# Altium PCB Power Controller V2.0.PcbDoc
Units mil, origin at the board's own origin, x right, y up, seen from the top; angles counter-clockwise.
Board outline 3317.12 x 5443.1 mil, 2 copper layers (Top Layer, Bottom Layer); 20 components, 20 nets, 69 pads, 0 vias.
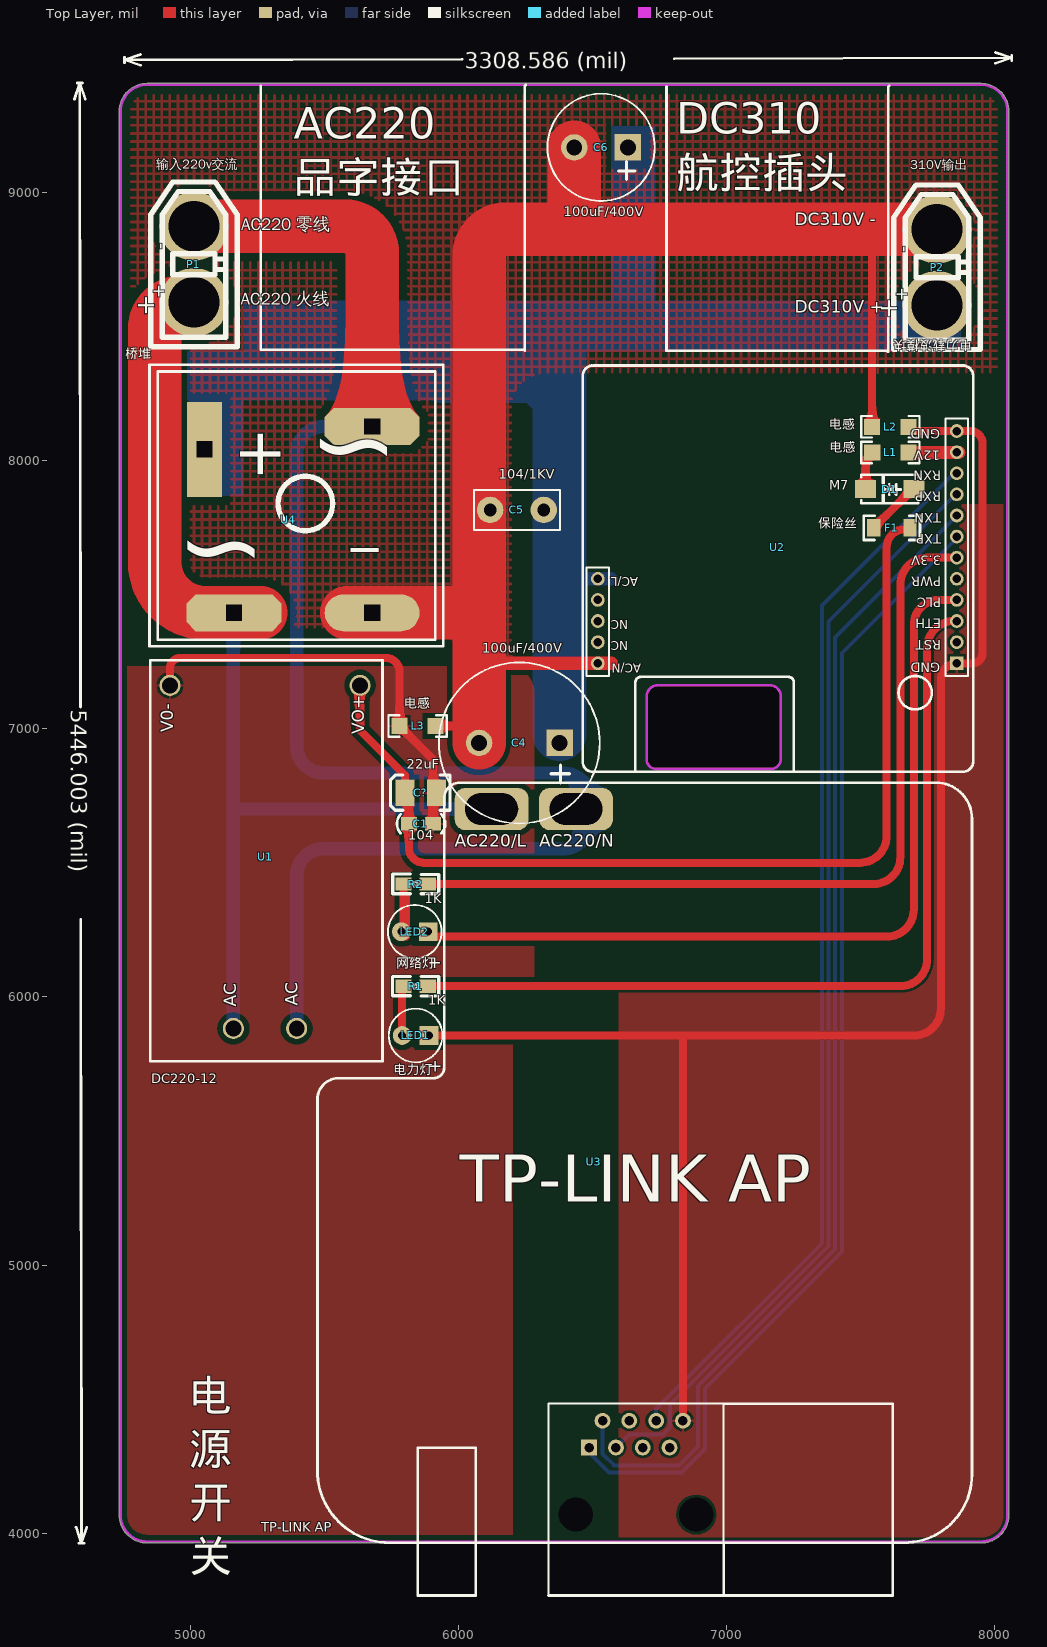
[diagram p0: Top Layer view]
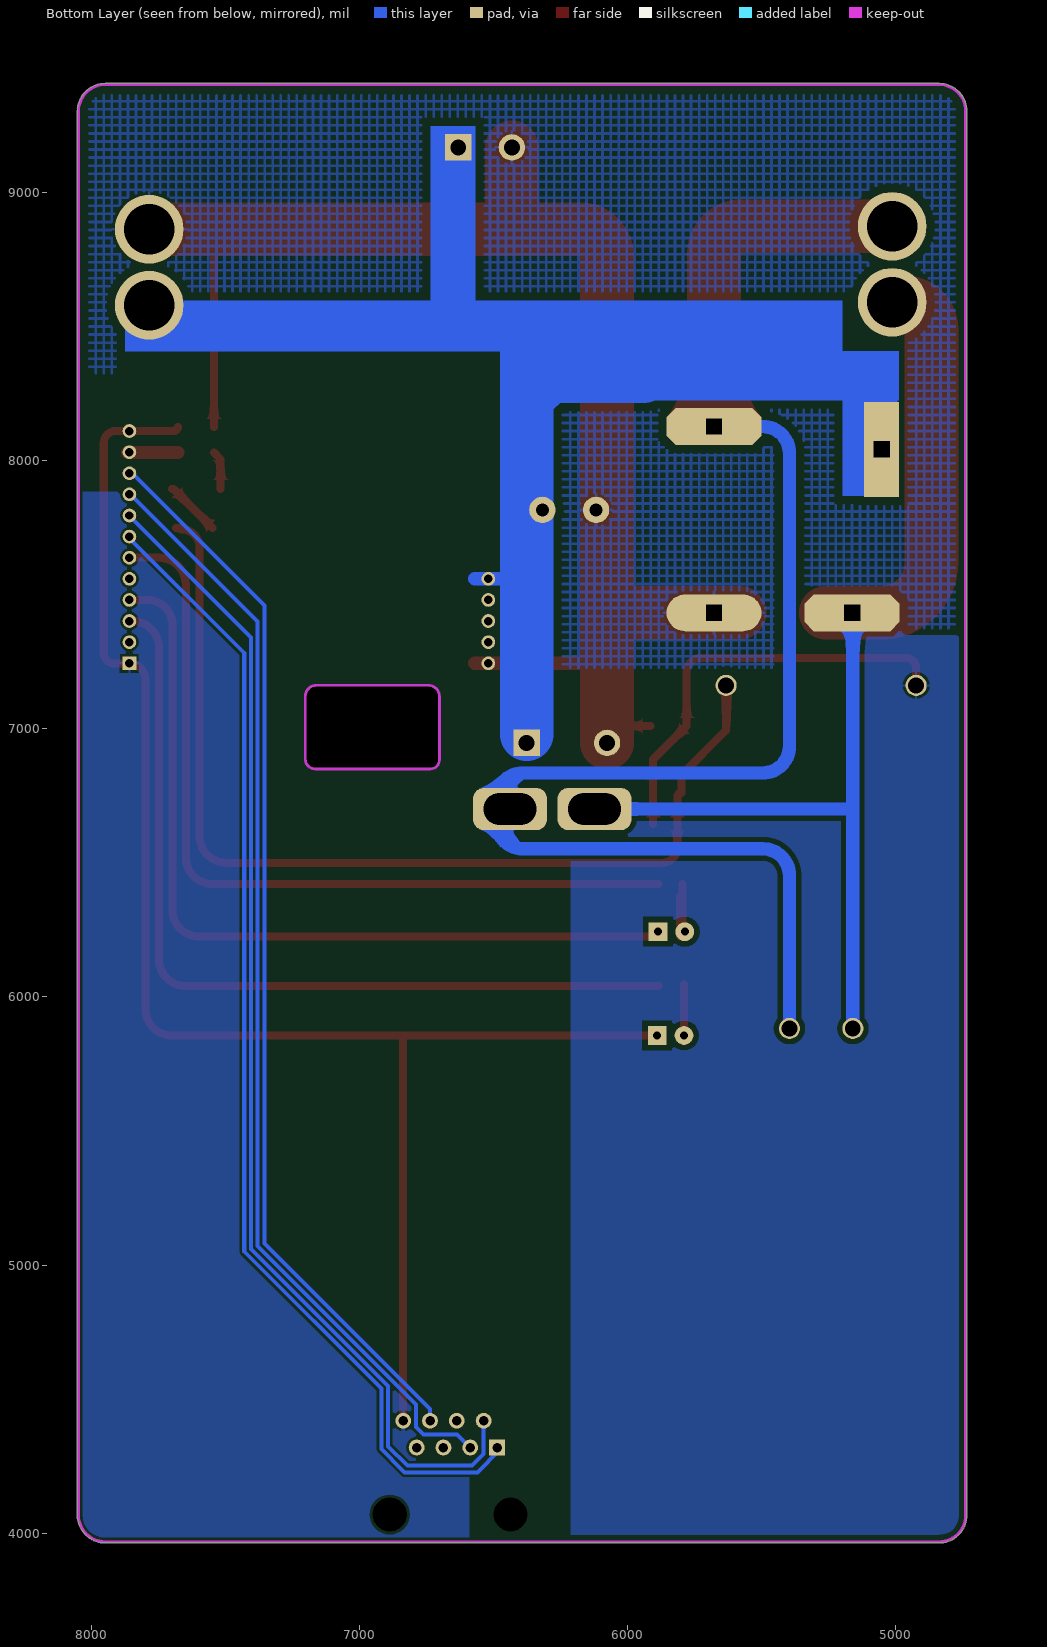
[diagram p1: Bottom Layer view, seen from below]

## Layer stack, top to bottom
Top Solder: solder mask 0.4, Solder Resist, Dk 3.5
Top Layer: signal copper 1.4
Dielectric 1: dielectric 12.6, FR-4, Dk 4.8
Bottom Layer: signal copper 1.4
Bottom Solder: solder mask 0.4, Solder Resist, Dk 3.5

## Board outline
4735.14,4066.93 4735.14,9303.15 cw(c4838.58,9303.15) 4838.58,9406.59 7948.82,9406.59 cw(c7948.82,9401.57) 7948.85,9406.59 cw(c7948.82,9303.15) 8052.26,9303.15 8052.26,4055.12 cw(c8047.24,4055.12) 8051.18,4052.01 cw(c7948.82,4066.93) 7948.82,3963.49 4838.58,3963.49 cw(c4838.58,4066.93)

## Design rules (kind name [scope] priority, off if disabled: settings)
Clearance [All] p1: gap=10
ComponentClearance [All] p1: gap=0 collisioncheckmode=3 verticalgap=0 showdistances=FALSE
DiffPairsRouting [All] p1: maxlimit=10 minlimit=10 mostfreqgap=10 toplayer_minwidth=15 toplayer_maxwidth=15 toplayer_prefwidth=15 bottomlayer_minwidth=15 bottomlayer_maxwidth=15 bottomlayer_prefwidth=15 maxuncoupledlength=500
PolygonConnect [All] p1: connectstyle=Relief reliefconductorwidth=10 reliefentries=4 polygonreliefangle="90 Angle" airgapwidth=10
RoutingVias [All] p1: holewidth=28 width=50 viastyle="Through Hole" minholewidth=28 minwidth=50 maxholewidth=28 maxwidth=50
SolderMaskExpansion [All] p1: expansion=4
Width [All] p1: maxlimit=500 minlimit=8 preferedwidth=10 minimp=50.000000 maximp=50.000000 favimp=50.000000
28 further rules are at their usual default settings.

## Classes and differential pairs
differential pair EPHY_TX: +EPHY_TX_P -EPHY_TX_N
differential pair EPHY_RX: +EPHY_RX_P -EPHY_RX_N

## Components (designator, comment, footprint, x,y, rotation, side; value= is the part's Value field where it differs from the comment)
C1 "104" 0805C 5820,6645 r0 top
C4 "100uF/400V" RB.3.6 6377,6947 r180 top
C5 "104/1KV" 无极性直插电容 6122,7820 r0 top
C6 "100uF/400V" RB.2.4 6632,9168 r180 top
C? "22uF" TAJ-B 5918,6761 r180 top
D1 "M7" SMA/DO-214AC 7692,7895 r180 top
F1 "保险丝" FUSE-1206 7683,7747 r180 top
L1 "电感" 1206L 7534,8027 r0 top
L2 "电感" 1206L 7687,8129 r180 top
L3 "电感" 1206L 5771,7007 r0 top
LED1 "电力灯" LED-RED直插) 5888,5858 r180 top
LED2 "网络灯" LED-BLUE(直插) 5886,6241 r180 top
P1 "输入220v交流" XT60-F 5014,8599 r90 top
P2 "310V输出" XT60-F 7785,8588 r90 top
R1 "1K" 0805R 5800,6039 r0 top
R2 "1K" 0805R 5881,6422 r180 top
U1 "DC220-12" AC220-DC5/12 5283.46,6507.87 r90 top locked
U2 "电力载波模块" 电力载波模块 7751,7183 r180 top
U3 "TP-LINK AP" TP-Link路由器盒封装 5474,6799 r0 top
U4 "桥堆" 整流全桥 5046,8034 r0 top

## Footprints (in the part's own frame and the unit in brackets; to place one, negate y for a bottom-side part, rotate by r counter-clockwise, add the part's x,y. Pads: shape width x height; smd on the part's side, far side on the other; paste and mask are expansions set on the pad)
0805C [mil]
  rect 60x50 smd: 1(-5,0) 2(85,0)
  silkscreen extent -50,-35 131,36, body extent -16,-26 102,29, height 37
0805R [mil]
  rect 60x50 smd: 1(-4.51,1.2) 2(85.49,1.2)
  silkscreen extent -46,-36 126,37, body extent -1,-23 78,26, height 18
1206L [mil]
  rect 60x60 smd: 1(9.1,3.2) 2(144.1,3.2)
  silkscreen extent -32,-37 185,43, body extent 12,-28 138,35, height 24
AC220-DC5/12 [mm]
  round 2 hole 1.5: 1(16.608,9.125) 2(16.608,-8.875) 3(-15.892,-2.875) 4(-15.892,3.125)
  silkscreen extent -19,-11 19,11
FUSE-1206 [mil]
  rect 50x65 smd: 1(-1,-2) 2(134,-2)
  silkscreen extent -39,-47 172,43, body extent 1,-36 127,28, height 34
LED-BLUE(直插) [mil]
  rect 70x70 hole 30: 1(-0.98,-1.97)
  round 70 hole 30: 2(99.02,-1.97)
  silkscreen extent -51,-102 149,98, body extent -22,-80 117,78, height 205
LED-RED直插) [mil]
  rect 70x70 hole 30: 1(-1.97,1.97)
  round 70 hole 30: 2(98.03,1.97)
  silkscreen extent -52,-98 148,102, body extent -20,-77 119,81, height 205
RB.2.4 [mm]
  rect 2.5x2.5 hole 1.5: 1(0,0)
  round 2.5 hole 1.5: 2(5.08,0)
  silkscreen extent -2.54,-5.08 7.62,5.08, body extent -2.78,-5.55 8.03,5.25, height 13
RB.3.6 [mm]
  rect 2.5x2.5 hole 1.5: 1(0,0)
  round 2.5 hole 1.5: 2(7.62,0)
  silkscreen extent -3.81,-7.62 11.43,7.62, body extent -5.17,-8.95 12.81,9.05, height 40.01
SMA/DO-214AC [mm]
  rect 2x1.75 smd: 1(-0.178,0.025) 2(4.422,0.025)
  silkscreen extent -0.58,-1.32 4.82,1.38, body extent -0.38,-1.32 4.73,1.35, height 2.12
TAJ-B [mm]
  rect 1.8x2.5 smd: 1(3,0) 2(0,0)
  silkscreen extent -1.27,-1.68 4.34,1.65, body extent -0.27,-1.4 3.22,1.4, height 1.9
TP-Link路由器盒封装 [mm]
  rect 1.5x1.5 hole 0.9: 1(25.736,-62.983)
  round 1.5 hole 0.9: 2(27.006,-60.443) 3(28.276,-62.983) 4(29.546,-60.443) 5(30.816,-62.983) 6(32.086,-60.443) 7(33.356,-62.983) 8(34.626,-60.443)
  rrect50% 7x4 hole 3 slot 5 at 0 deg: 9(16.5,-2.5) 10(24.5,-2.5)
  round 2.95 hole 3.25 unplated: MH3(24.466,-69.333) MH4(35.896,-69.333)
  silkscreen extent 0,-77 62,0
XT60-F [mm]
  round 6.5 hole 4.8: 1(-0.221,0.009) 2(6.979,0.009)
  silkscreen extent -4.42,-4.09 11.18,4.11, body extent -4.52,-4.05 11.38,4.1, height 16.5
整流全桥 [mm]
  oct 9x3.5 hole 1.5 square: AC1(2.972,-15.291) AC2(16.053,2.362)
  rect 3.302x9 hole 1.5 square: DC+(0.178,0.203)
  oval 9x3.5 hole 1.5 square: DC-(16.053,-15.291)
  silkscreen extent -5.03,-18.47 22.78,8.2
无极性直插电容 [mm]
  round 2.5 hole 1.2: 1(-0.102,-0.102) 2(4.978,-0.102)
  silkscreen extent -1.63,-2.01 6.5,1.8, body extent -1.06,-0.95 5.94,0.75, height 7.06
电力载波模块 [mm]
  round 1.3 hole 0.8: 0(31.274,-7.551) 2(-2.726,-3.551) 3(-2.726,-5.551) 4(-2.726,-7.551) 5(-2.726,-9.551) 6(-2.726,-11.551) 7(-2.726,-13.551) 8(-2.726,-15.551) 9(-2.726,-17.551) 10(-2.726,-19.551) 11(-2.726,-21.551) 12(-2.726,-23.551) 13(31.274,-9.551) 14(31.274,-5.551) 15(31.274,-3.551) 16(31.274,-1.551)
  rect 1.3x1.3 hole 0.8: 1(-2.726,-1.551)
  Keep-Out Layer board cut-out: 13.945,1.575 13.945,7.531 13.945,7.623 13.98,7.802 14.05,7.97 14.152,8.122 14.281,8.251 14.432,8.353 14.601,8.423 14.78,8.458 14.871,8.458 14.871,8.458 25.782,8.458 25.867,8.458 26.034,8.425 26.191,8.36 26.332,8.266 26.452,8.146 26.546,8.004 26.611,7.847 26.645,7.681 26.645,7.596 26.645,7.596 26.645,1.587 26.645,1.483 26.604,1.28 26.525,1.088 26.409,0.915 26.263,0.769 26.09,0.653 25.898,0.574 25.695,0.533 25.591,0.533 25.591,0.533 14.986,0.533 14.883,0.533 14.682,0.573 14.493,0.652 14.322,0.766 14.177,0.911 14.063,1.082 13.985,1.271 13.945,1.472 13.945,1.575
  Keep-Out Layer lines w0.254: 26.645,7.596 ccw(c25.782,7.596) 25.782,8.458 14.871,8.458 ccw(c14.871,7.531) 13.945,7.531 13.945,1.575 ccw(c14.986,1.575) 14.986,0.533 25.591,0.533 ccw(c25.591,1.587) 26.645,1.587 26.645,7.596
  silkscreen extent -4.28,-29.76 32.72,8.74, body extent -3.93,-24.68 32.52,-0.13, height 4.35

## Part data
C1: library part Cap1, "无极贴片电容"
C4 C6: library part Cap3, "直插极性电容"
C5: library part Cap2, "无极直插电容"
C?: library part "Pol Cap", "极性贴片电容"
D1: library part Diode, "二极管"
F1: library part Fuse
L1 L2 L3: library part L
LED1 LED2 P1 P2: library part 接线端子-2PIN, "2PIN"
R1 R2: library part Res, "电阻"
U1: library part DC220-24
U2: library part 电力载波模块6410
U3: library part TP-LINK封装

## Nets (pads, with @x,y where several pads share a name; then routed paths per layer and width w, separated by ;. In a path a pad name is that pad's centre, name@x,y a point inside that pad or via, vN(x,y) a via of type N, cw(c..) or ccw(c..) an arc to the next point about the centre after c; other vN are vias at no path point)
12.0V: C1.1 C?.1 F1.1 U1.2 | length 3757.4
  Top Layer w30: U1.2 5632.87,6994.13 5799.89,6827.11 C?.1 cw(c5799.89,6745.89) 5815,6745.89 C1.1 5815,6556.25 ccw(c5871.25,6556.25) 5871.25,6500 7497,6500 ccw(c7497,6600) 7597,6600 7597,7677.07 cw(c7663.34,7677.07) 7663.34,7743.41 cw(c7684,7708) F1.1
AC220_L: P1.1 U1.4 U3.9 U4.AC1 | length 4148.3
  Top Layer w200: P1.1 4967,8590.3 ccw(c4967,8490.3) 4867,8490.3 4867,7621.49 ccw(c5056.49,7621.49) 5056.49,7432 U4.AC1 U4.AC1@5262,7432
  Bottom Layer w50: U1.4 5160.43,6712 ; U4.AC1 ccw(c5163,7429.43) 5160.43,7429.43 5160.43,6712 ; U3.9@6175.35,6700.79 5171.65,6700.79 cw(c5171.65,6712) 5160.43,6712
AC220_N: P1.2 U1.3 U3.10 U4.AC2 | length 5834.1
  Top Layer w200: P1.2 5578,8873.76 cw(c5578,8773.76) 5678,8773.76 U4.AC2@5678,8160
  Bottom Layer w50: U1.3 5396.65,6452 cw(c5496.65,6452) 5496.65,6552 6390.31,6552 ccw(c6390.31,6652) 6490.31,6652 6490.31,6700.79 6490.31,6735 ccw(c6390.31,6735) 6390.31,6835 5496.65,6835 cw(c5496.65,6935) 5396.65,6935 5396.65,8027 cw(c5496.65,8027) 5496.65,8127 U4.AC2
DC310V: C4.1 C5.2 C6.1 P2.1 U2.13 U4.DC+ | length 2168.3
  Bottom Layer w30: 6377,7557 cw(c6379.03,7557) 6379.03,7559.03
  Bottom Layer w50: 6379.03,7559.03 6569.73,7559.03
  Bottom Layer w200: 5941,8314 6294,8314 6377,8231 ; C4.1@6377,6980 6377,7557 6377,8231 ; 6377,8484 6377,8231
DGND: L2.1 LED1.1 U2.1 U2.12 U3.8 | length 5938.3
  Top Layer w30: LED1.1 6841,5856.03 ; U3.8 6837.23,5852.26 6841,5856.03 ; L2.1 ccw(c7693.49,8125.8) 7693.49,8110.21 U2.12 7909.79,8110.21 cw(c7909.79,8066) 7954,8066 7954,7281 cw(c7917.07,7281) 7917.07,7244.07 U2.1 ccw(c7858.32,7184.76) 7799,7184.76 7799,5956.03 cw(c7699,5956.03) 7699,5856.03 6888.98,5856.03 6841,5856.03
EPHY_RX_N: U2.10 U3.6 | length 3999.8
  Bottom Layer w15: U3.6 6737.23,4463.23 7355,5081 7355,7459 U2.10@7853,7957
EPHY_RX_P: U2.9 U3.3 | length 4163.1
  Bottom Layer w15: U3.3 6635.89,4368 6762,4368 6789,4395 6789,4479.64 7380,5070.64 7380,7400 U2.9@7861,7881
EPHY_TX_N: U2.8 U3.2 | length 4398.4
  Bottom Layer w15: U3.2 6537.23,4295.77 6581,4252 6822,4252 6894,4324 6894,4549.29 7405,5060.29 7405,7340 U2.8@7859.28,7794.28
EPHY_TX_P: U2.7 U3.1 | length 4331.4
  Bottom Layer w15: U3.1@6499.09,4331.2 6477.94,4310.06 6561,4227 6832.36,4227 6839.68,4234.32 6919,4313.64 6919,4538.93 7430,5049.93 7430,7282 U2.7@7861.41,7713.41
GND: C4.2 C5.1 C6.2 L2.2 L3.2 P2.2 U2.16 U4.DC- | length 5845.6
  Top Layer w30: L3.2 6013.8,7010.2 C4.2 ; 6073.2,7124.2 6077,7128 ; 7532,8862.76 cw(c7532,8851.86) 7542.9,8851.86 L2.2
  Top Layer w50: 6077,7267 ccw(c6099.93,7267) 6099.93,7244.07 6569.73,7244.07
  Top Layer w200: U4.DC-@5583,7432 6062,7432 ccw(c6062,7447) 6077,7447 ; C4.2 6077,7128 6077,7267 6077,7447 ; C6.2 6432,8888.76 ccw(c6458,8888.76) 6458,8862.76 ; P2.2 7532,8862.76 6458,8862.76 ; 6077,7447 6077,8762.76 cw(c6177,8762.76) 6177,8862.76 6458,8862.76
NetD1_1: D1.1 F1.2 | length 210.1
  Top Layer w30: F1.2 7694,7894 D1.1
NetD1_2: D1.2 L1.1 | length 146.6
  Top Layer w30: D1.2 7517.9,8005 L1.1
NetLED1_2: LED1.2 R1.1 | length 191
  Top Layer w30: LED1.2 R1.1@5789.97,6047
NetLED2_1: LED2.1 U2.4 | length 3125.7
  Top Layer w30: LED2.1@5904.98,6224.97 7598,6224.97 ccw(c7598,6324.97) 7698,6324.97 7698,7387 cw(c7791.29,7387) 7791.29,7480.29 U2.4
NetLED2_2: LED2.2 R2.2 | length 336.1
  Top Layer w30: LED2.2 ccw(c5786.98,6251.5) 5795.51,6251.5 R2.2 ; 5800.51,6375.8 cw(c5800.51,6371.32) 5804.98,6371.32 LED2.2@5804.98,6224.97
PGND: C1.2 C?.2 L3.1 U1.1 | length 1590.7
  Top Layer w30: U1.1 4924.21,7226.21 cw(c4962,7226.21) 4962,7264 5729,7264 cw(c5729,7212.9) 5780.1,7212.9 L3.1 5905,6885.3 C1.2
PLC_3.3V: R2.1 U2.6 | length 3103.9
  Top Layer w30: R2.1 7548,6420.8 ccw(c7548,6520.8) 7648,6520.8 7648,7537.77 cw(c7748,7537.77) 7748,7637.77 U2.6
PLC_12V: L1.2 U2.11 | length 186.9
  Top Layer w50: L1.2 U2.11@7865,8030.2
PLC_ETH: R1.2 U2.3 | length 3248.3
  Top Layer w30: R1.2 7648,6040.2 ccw(c7648,6140.2) 7748,6140.2 7748,7301.55 cw(c7848,7301.55) 7848,7401.55 U2.3
PLC_PWR: U2.5
pads on no net: U2.0 U2.2 U2.14 U2.15 U3.4 U3.5 U3.7 U3.MH3 U3.MH4

## Polygon pours and split planes (outlines as drawn)
DGND on Top Layer "Top Layer-No Net" (solid, remove dead copper, pour order 32): 8516,7837 6697,7837 ccw(c6697,7737) 6597,7737 6597,6040.2 6597,3662 ccw(c6697,3662) 6697,3562 8329,3562 8515,3562 ccw(c8515,3662) 8615,3662 8615,4413 8615,7760 ccw(c8515,7760) 8515,7860 8381,7860
GND on Top Layer "Top Layer-No Net" (hatched 90Degree grid 30 track 10, remove dead copper, pour order 10): 4308,8965 4308,9638 cw(c4408,9638) 4408,9738 4907,9738 8322,9738 cw(c8322,9638) 8422,9638 8422,7442 8422,7368 cw(c8322,7368) 8322,7268 4316,7268 ccw(c4316,7283) 4331,7283 4331,7677
PGND on Top Layer "Top Layer-No Net" (solid, remove dead copper, pour order 20): 4056,7233 6182,7233 cw(c6182,7133) 6282,7133 6282,6782 6282,3464 cw(c6182,3464) 6182,3364 5699,3364 4071,3364 cw(c4071,3464) 3971,3464 3971,4739
DGND on Bottom Layer "Top Layer-No Net" (solid, remove dead copper, pour order 30): 8551,7884 6691,7884 ccw(c6691,7784) 6591,7784 6591,6717 6591,3656 ccw(c6691,3656) 6691,3556 7472,3556 8451,3556 ccw(c8451,3656) 8551,3656 8551,4168 8551,7789 ccw(c8451,7789) 8451,7889 8376,7889
GND on Bottom Layer "Top Layer-No Net" (hatched 90Degree grid 30 track 10, remove dead copper, pour order 12): 4312,8961 4312,9747 cw(c4412,9747) 4412,9847 4884,9847 8232,9847 cw(c8232,9747) 8332,9747 8332,8823 8332,7327 cw(c8232,7327) 8232,7227 8213,7227 4400,7227 cw(c4400,7327) 4300,7327 4300,7925
PGND on Bottom Layer "Top Layer-No Net" (solid, remove dead copper, pour order 22): 3971,7364 6156,7364 cw(c6156,7264) 6256,7264 6256,6585 6256,3694 cw(c6156,3694) 6156,3594 5863,3594 3960,3594 cw(c3960,3694) 3860,3694 3860,4733

## Keep-outs
Keep-Out Layer:
  lines w10: 8047.24,4055.12 8047.24,9303.15 ccw(c7948.82,9303.15) 7948.82,9401.57 4838.58,9401.57 ccw(c4838.58,9303.15) 4740.16,9303.15 4740.16,4066.93 ccw(c4838.58,4066.93) 4838.58,3968.5 7948.82,3968.5 ccw(c7948.82,4066.93) 8047.24,4066.93

## Other copper
Bottom Layer:
  rectangle net DC310V: 6568,8415 6735,9247
  rectangle net DC310V: 5198,8406 7875,8597
  rectangle net DC310V: 4994,7868 5198,8257
  rectangle net DC310V: 4988,8224 6031,8409

## Silkscreen, mask and mechanical layers (free items; w line width, h text height)
Top Overlay:
  lines w10: 4568.07,9347.98 4588,9408 ; 4573.93,4021.98 4594,3962 ; 4578,9407.99 4598,9408.01 ; 4584,3961.99 4604,3962.01 ; 4590.56,7080.88 4588,9408 ; 4591.44,6289.12 4594,3962 ; 4608.07,9348.02 4588,9408 ; 4613.93,4022.02 4594,3962 ; 4754.4,9504.18 4754.45,9484.18 ; 4814.38,9514.32 4754.42,9494.18 ; 4814.47,9474.32 4754.42,9494.18 ; 5263.15,9397.64 5263.15,8413.39 6243.46,8413.39 6247.4,8409.45 6247.4,9397.64 6251.34,9401.57 ; 6012.84,9497.16 4754.42,9494.18 ; 6775.59,9393.7 6775.59,8409.45 7598.43,8409.45 7602.36,8405.51 7602.36,9393.7 7606.3,9397.64 ; 6804.59,9499.03 8063,9502 ; 8002.95,9521.86 8063,9502 ; 8003.05,9481.86 8063,9502 ; 8063.02,9492 8062.98,9512
  text "3308.586 (mil)" at 6022.92,9461.19 h60 r0.14
  text "DC310 / 航控插头" at 6812,8979 h200
  text "AC220 / 品字接口" at 5386,8962 h200
  text "DC310V -" at 7255,8860 h78.74
  text "AC220 零线" at 5190,8842 h78.74
  text "AC220 火线" at 5188,8564 h78.74
  text "DC310V +" at 7255,8534 h78.74
  text "5446.003 (mil)" at 4554.58,7070.84 h60 r270.06
  text "电 / 源 / 开 / 关" at 4996,3818 h200

## Text inside footprints (layer, text, board x,y; h text height)
LED1: Top Overlay "+" at 5887.59,5775.74 h78.74 r180
LED2: Top Overlay "+" at 5884.61,6162.68 h78.74 r180
P1: Top Overlay "-" at 4855.63,8810.03 h80 r270; Top Overlay "+" at 4847.63,8657.03 h80 r270; Top Overlay "+" at 4781.63,8618.03 h118.11 r270
P2: Top Overlay "-" at 7626.63,8799.03 h80 r270; Top Overlay "+" at 7618.63,8646.03 h80 r270; Top Overlay "+" at 7552.63,8607.03 h118.11 r270
U1: Top Overlay "VO+" at 5664.52,6978.93 h78.74 r90; Top Overlay "V0-" at 4953.41,6985.93 h78.74 r90; Top Overlay "AC" at 5417.15,5966.82 h78.74 r90; Top Overlay "AC" at 5187.78,5962.82 h78.74 r90
U2: Top Overlay "GND" at 7796,7260 h60 r180; Top Overlay "RST" at 7799.99,7342.94 h60 r180; Top Overlay "ETH" at 7799.99,7422.49 h60 r180; Top Overlay "PLC" at 7799.99,7500.94 h60 r180; Top Overlay "PWR" at 7799.99,7580.49 h60 r180; Top Overlay "3.3V" at 7799.99,7658.94 h60 r180; Top Overlay "TXP" at 7799.94,7738.49 h60 r180; Top Overlay "TXN" at 7799.94,7817.49 h60 r180; Top Overlay "RXP" at 7799.99,7896.49 h60 r180; Top Overlay "RXN" at 7799.99,7975.49 h60 r180; Top Overlay "12V" at 7796.06,8050.56 h60 r180; Top Overlay "GND" at 7796,8129 h60 r180; Top Overlay "AC/N" at 6681,7254 h55 r180; Top Overlay "AC/L" at 6670,7577 h55 r180; Top Overlay "NC" at 6634,7338 h55 r180; Top Overlay "NC" at 6633,7415 h55 r180
U3: Top Overlay "AC220/N" at 6300.77,6543.09 h80; Top Overlay "AC220/L" at 5985.81,6543.09 h80
U4: Top Overlay "~" at 5778,7827 h500; Top Overlay "~" at 5283,7447 h500; Top Overlay "-" at 5723,7472 h500; Top Overlay "+" at 5128,7922 h300 r270